# Altium PCB MP3_RS485.PcbDoc
Units mm, origin at the board's own origin, x right, y up, seen from the top; angles counter-clockwise.
Board outline 86.77 x 66 mm, 2 copper layers (Top Layer, Bottom Layer), stack 1.569 mm thick; 124 components, 97 nets, 351 pads, 77 vias.
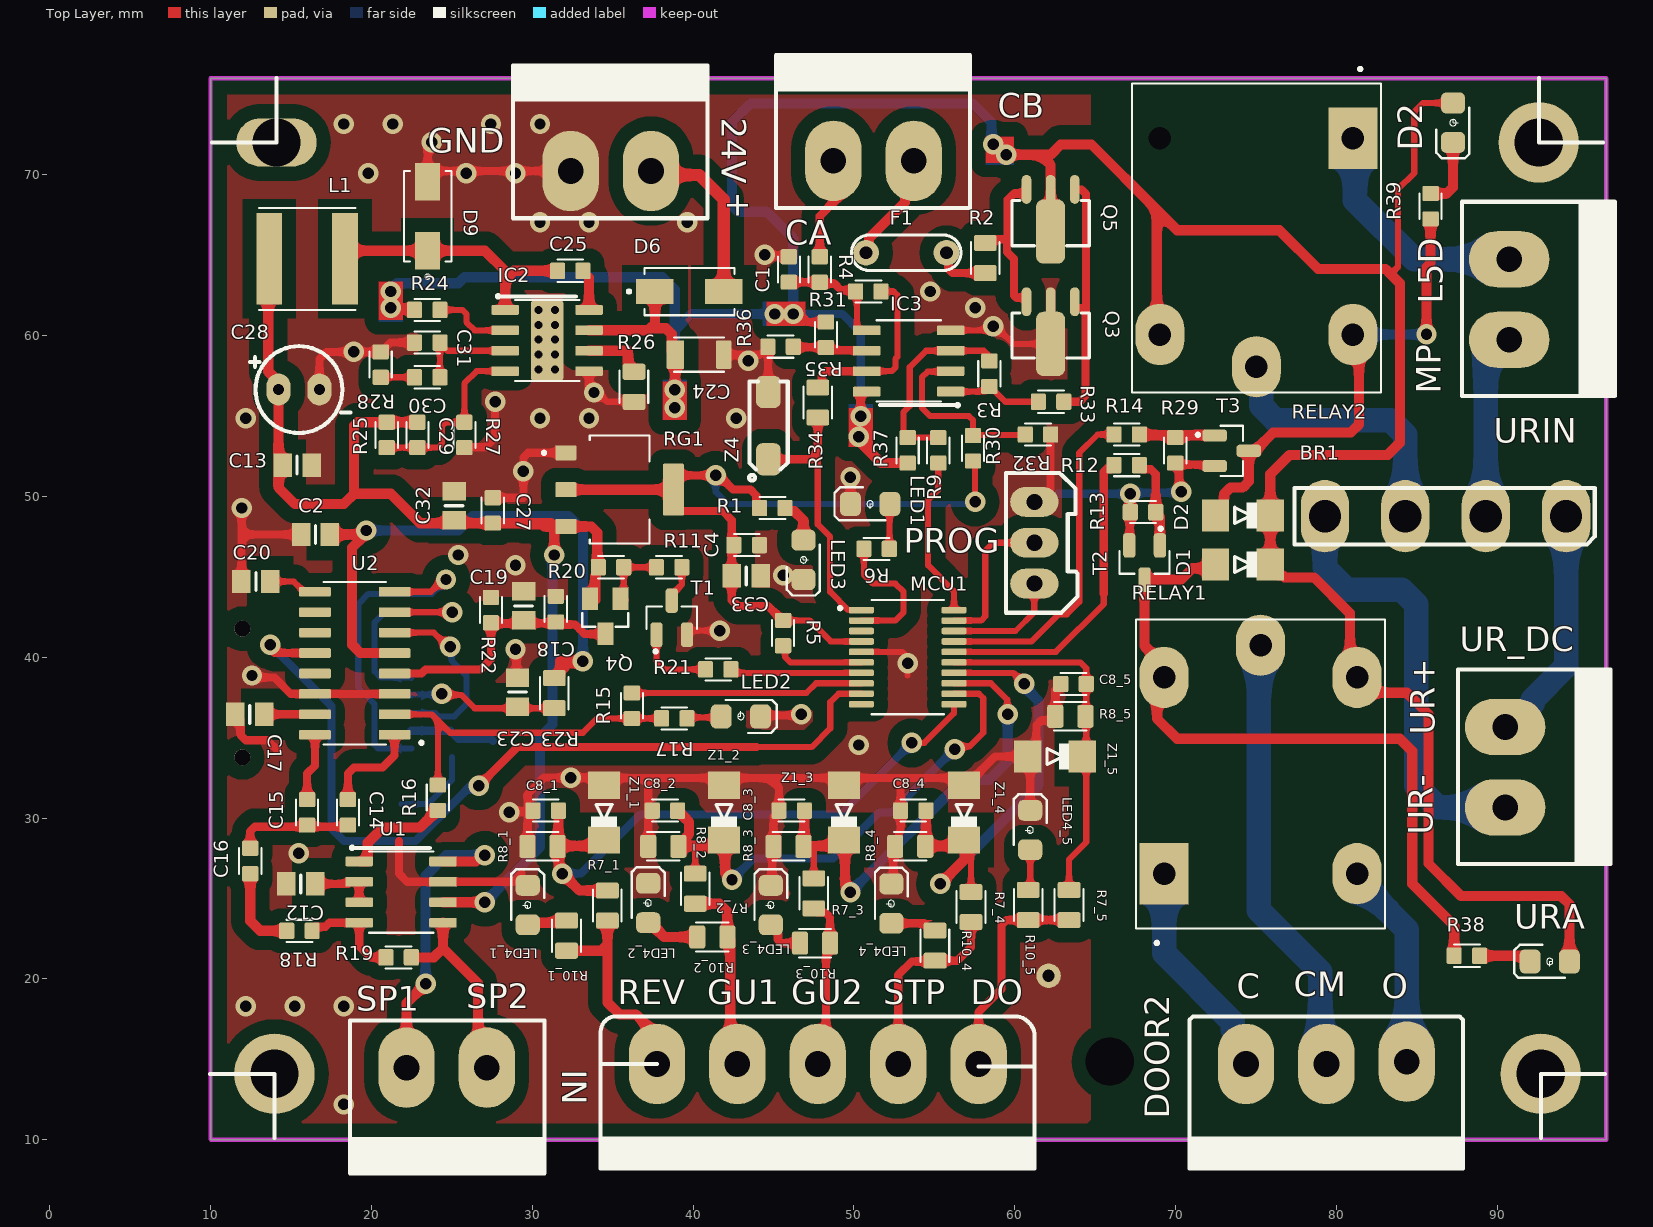
[diagram p0: Top Layer view]
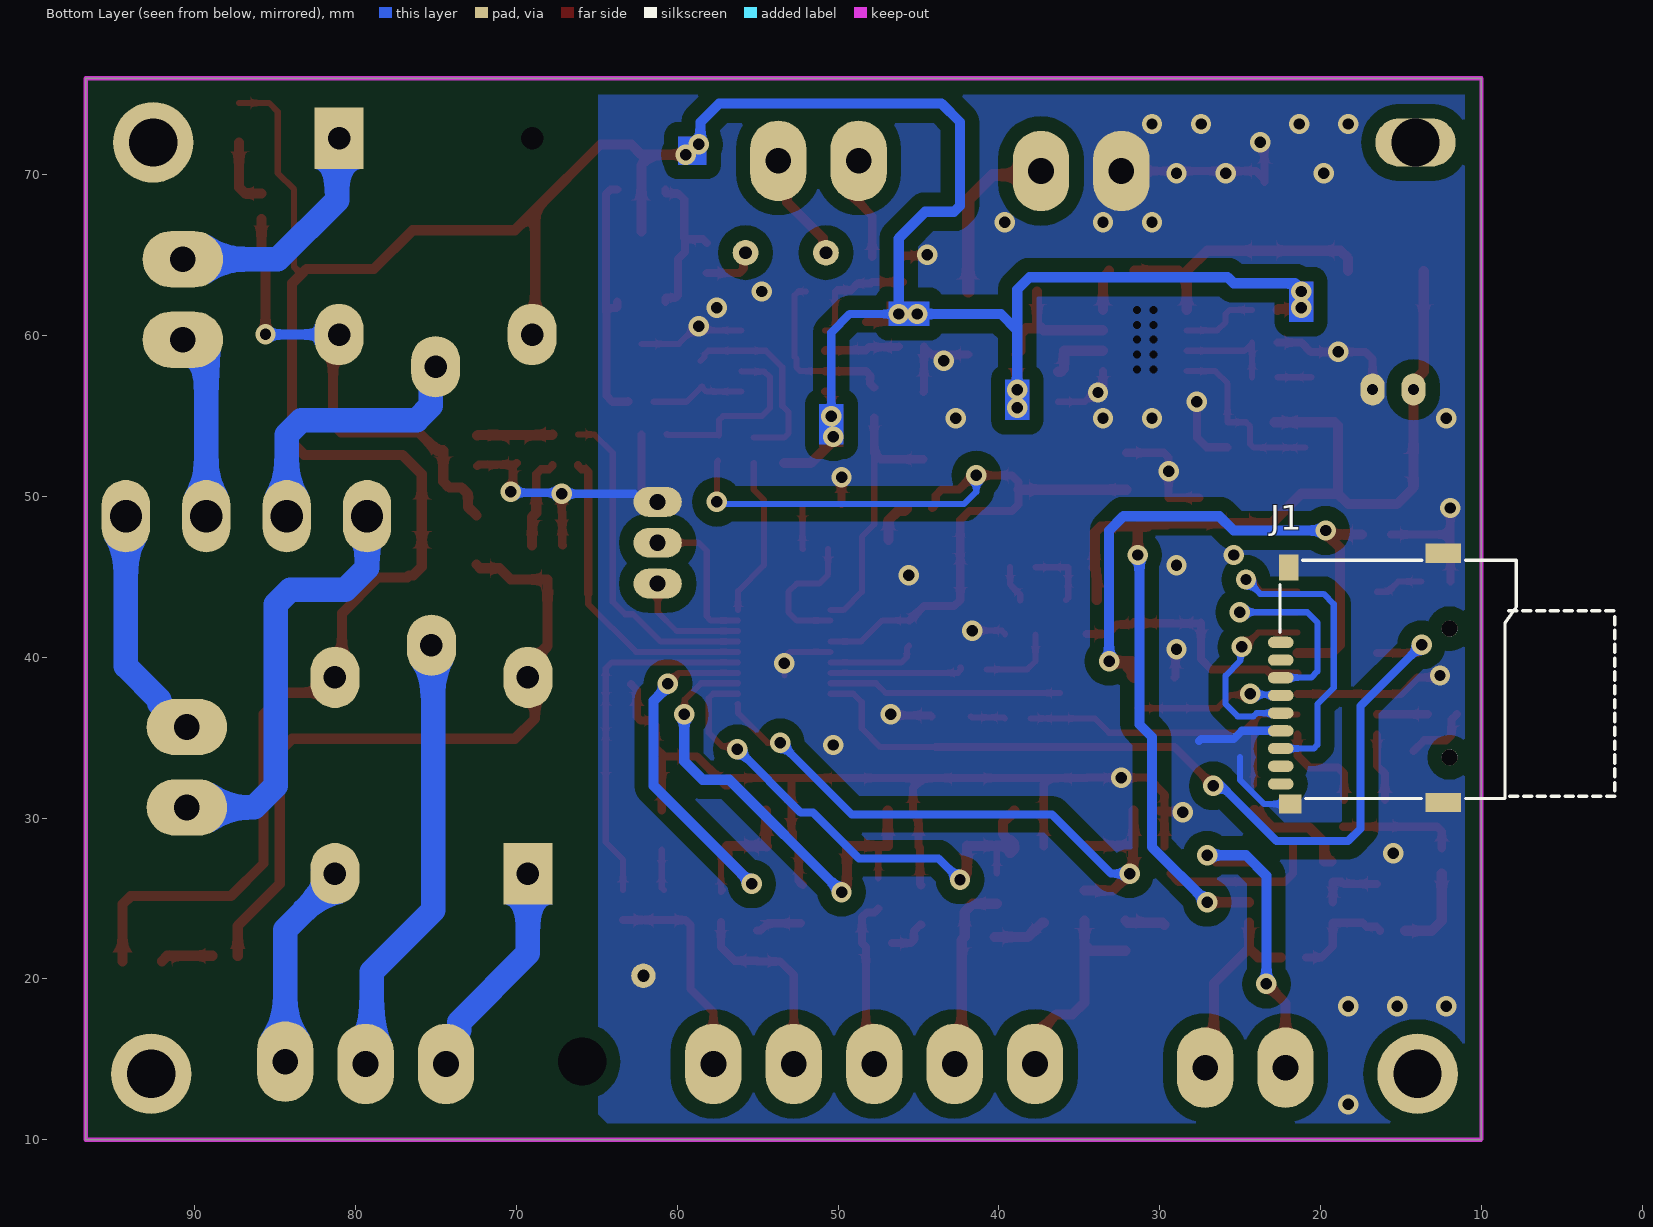
[diagram p1: Bottom Layer view, seen from below]
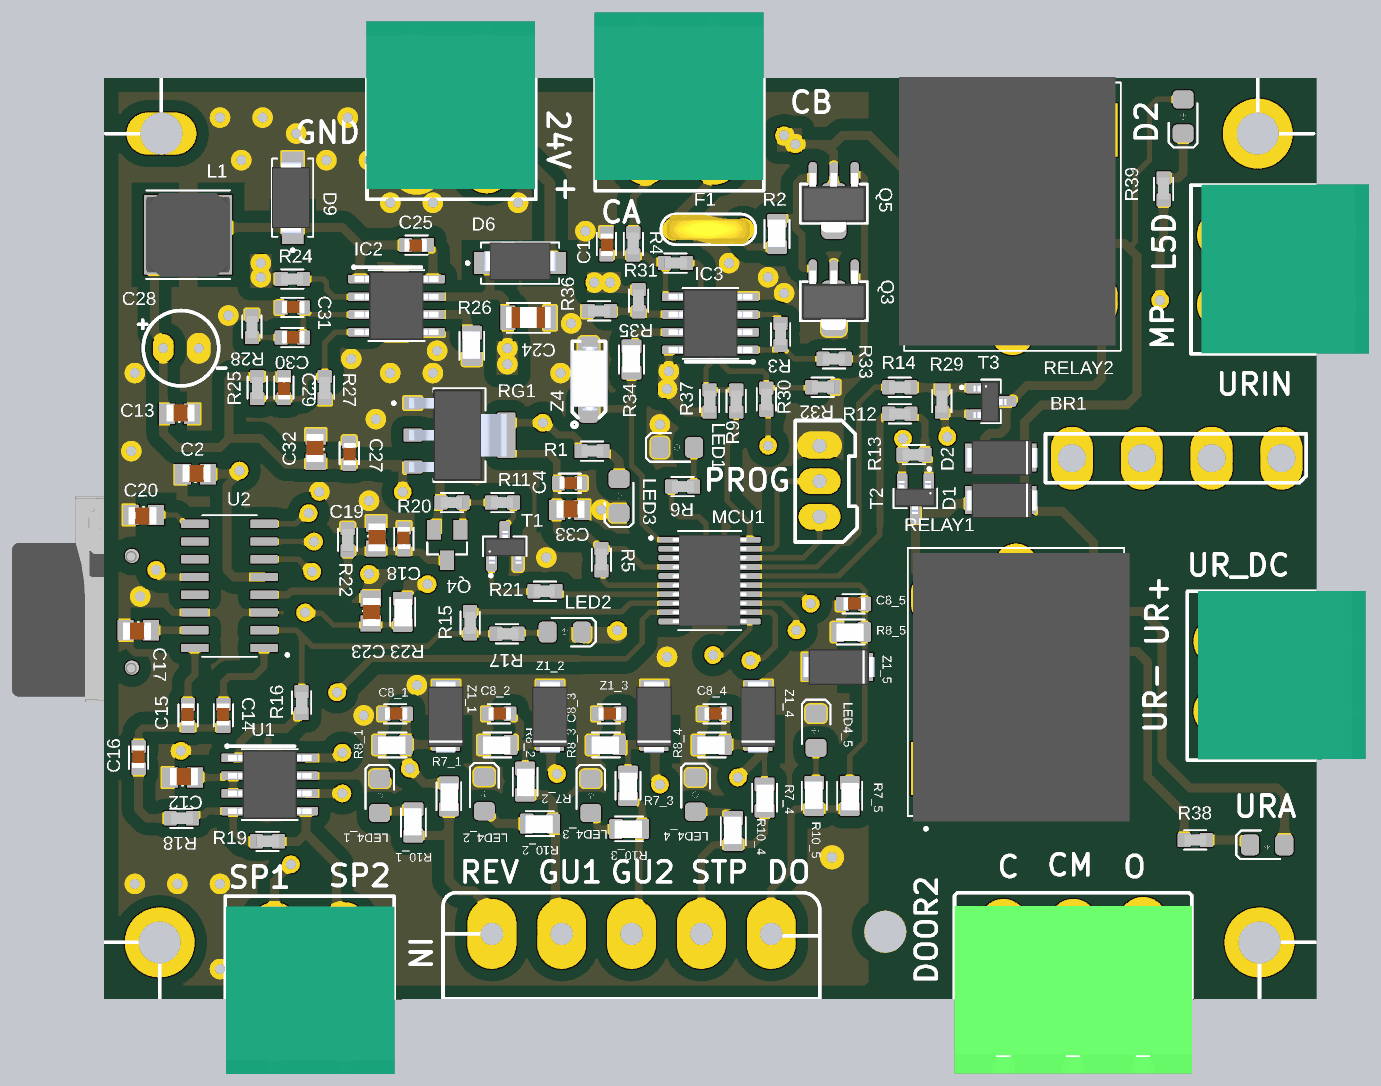
[diagram p2: 3D render of the assembled board from above, using the file's embedded part models]

## Layer stack, top to bottom
Top Solder: solder mask 0.0254, SM-001, Dk 4
Top Layer: signal copper 0.035
Dielectric 1: core 1.4986, Core-043, Dk 4.3
Bottom Layer: signal copper 0.035
Bottom Solder: solder mask 0.0254, SM-001, Dk 4

## Board outline
10,10.033 10,76 96.774,76 96.774,10 10.033,10

## Design rules (kind name [scope] priority, off if disabled: settings)
Clearance poly [InPolygon] p1: gap=0.889 ignorepadtopadclearanceinfootprint=FALSE
Clearance [All] p2: gap=0.178 ignorepadtopadclearanceinfootprint=FALSE
PolygonConnect [All] p1: connectstyle=Direct reliefconductorwidth=0.254 reliefentries=4 polygonreliefangle="90 Angle" airgapwidth=0.254
RoutingVias [All] p1: holewidth=0.711 width=1.27 viastyle="Through Hole" minholewidth=0.711 minwidth=1.27 maxholewidth=0.711 maxwidth=1.27
SolderMaskExpansion [All] p1: expansion=0.102 istentingtop=FALSE
Width [All] p1: maxlimit=2 minlimit=0.254 preferedwidth=0.254 minimp=50.000000 maximp=50.000000 favimp=50.000000
30 further rules are at their usual default settings.

## Classes and differential pairs
net class IN_24_[1..5]: IN_24_1 IN_24_2 IN_24_3 IN_24_4 IN_24_5
component class 5: C8_5 LED4_5 R7_5 R8_5 R10_5 Z1_5
component class U_RELAY: BR1 D1 D2 DOOR2 R12 R13 R14 R29 R38 R39 RELAY1 RELAY2 T2 T3 UR_DC URA URIN
channel class RES_IN24: 1 2 3 4
net class IN[1..5]: IN1 IN2 IN3 IN4 IN5
component class U_SER_24V: C1 F1 IC3 Q3 Q5 R2 R3 R4 R9 R30 R31 R32 R33 R34 R35 R36 R37 Z4
component class U_Power_Low_V: C24 C25 C27 C28 C29 C30 C31 C32 C33 D9 IC2 L1 LED3 R1 R24 R25 R26 R27 R28 RG1
component class U_MP3: C2 C12 C13 C14 C15 C16 C17 C18 C19 C20 C23 J1 LED2 Q4 R11 R15 R16 R17 R18 R19 R20 R21 R22 R23 SP1 T1 U1 U2
component class U_MCU: C4 LED1 MCU1 PROG R5 R6
component class Multi: 24V CA D6 IN
component class 4: C8_4 LED4_4 R7_4 R8_4 R10_4 Z1_4
component class 3: C8_3 LED4_3 R7_3 R8_3 R10_3 Z1_3
component class 2: C8_2 LED4_2 R7_2 R8_2 R10_2 Z1_2
component class 1: C8_1 LED4_1 R7_1 R8_1 R10_1 Z1_1

## Components (designator, comment, footprint, x,y, rotation, side; value= is the part's Value field where it differs from the comment)
24V "" CONECTOR/FONIX/2PIN 37.312,70.294 r180 top
BR1 "GBU410" BRIDGE_GBU410 94.281,48.768 r180 top
C1 "1NF" CAP-0603 45.974,64.008 r270 top
C2 "1uF" CAP-0805 17.446,47.603 r180 top
C4 "100nF" CAP-0603 43.434,46.99 r0 top
C8_1 "10nF" CAP-0603 30.936,30.48 r0 top (schematic designator C8)
C8_2 "10nF" CAP-0603 38.354,30.48 r0 top (schematic designator C8)
C8_3 "10nF" CAP-0603 46.228,30.48 r0 top (schematic designator C8)
C8_4 "10nF" CAP-0603 53.796,30.48 r0 top (schematic designator C8)
C8_5 "10nF" CAP-0603 63.754,38.354 r0 top (schematic designator C8)
C12 "1uF" CAP-0805 16.535,25.886 r180 top
C13 "1uF" CAP-0805 16.303,51.921 r180 top
C14 "1uF" CAP-0603 18.52,30.455 r90 top
C15 "1uF" CAP-0603 15.98,30.455 r90 top
C16 "100nF" CAP-0603 12.446,27.432 r90 top
C17 "1uF" CAP-0805 11.51,36.471 r0 top
C18 "100nF" CAP-0603 31.442,43.094 r90 top
C19 "1uF" CAP-0805 29.442,42.266 r90 top
C20 "1uF" CAP-0805 11.891,44.726 r0 top
C23 "1uF" CAP-0805 29.061,36.91 r90 top
C24 "10UF" CAP-1206 40.386,58.674 r0 top
C25 "100nF" CAP-0603 32.258,64.008 r180 top
C27 "100nF" CAP-0603 27.559,49.022 r270 top
C28 "100uF/16V" CAP-EL-P100mil 15.494,56.64 r180 top
C29 "NU" CAP-0603 22.877,53.717 r270 top
C30 "100pF" CAP-0603 23.57,57.421 r0 top
C31 "NU" CAP-0603 23.57,59.58 r0 top
C32 "1uF" CAP-0805 25.168,50.339 r270 top
C33 "10uF" CAP-0805 44.225,45.04 r180 top
CA "" CONECTOR/FONIX/2PIN 53.648,70.929 r180 top (schematic designator RS)
D1 "4148" mini_melf 74.041,45.72 r180 top
D2 "LED?" LED/0805 87.249,72.009 r90 top
D2 "4148" mini_melf 74.041,48.768 r180 top
D6 "M7" DIOD/1N4007/SMD 37.611,62.738 r0 top
D9 "US1M" DIOD/1N4007/SMD 23.495,65.259 r90 top
DOOR2 "CONECTOR/FONIX/3PIN" CONECTOR/FONIX/3PIN 74.375,14.708 r0 top
F1 "fuze" PPTC 53.433,64.851 r180 top
IC2 "MP4560DN" SOP8_HIT 28.352,61.557 r0 top
IC3 "LM358" SOP-8 53.021,58.547 r180 top
IN "phonix_5pin" phonix_5pin 37.752,14.708 r0 top (schematic designator *)
J1 "SD_MICRO" MEMORY_RAVIS 14.478,37.973 r270 bottom
L1 "680uH" NR6028T680 16.002,64.77 r180 top
LED1 "LED-1COLER" LED/0805 49.784,49.53 r0 top
LED2 "R" LED/0805 44.196,36.322 r180 top
LED3 "G" LED/0805 46.863,44.831 r90 top
LED4_1 "R" LED/0805 29.718,25.818 r270 top (schematic designator LED4)
LED4_2 "R" LED/0805 37.211,25.945 r270 top (schematic designator LED4)
LED4_3 "R" LED/0805 44.831,25.818 r270 top (schematic designator LED4)
LED4_4 "R" LED/0805 52.324,25.908 r270 top (schematic designator LED4)
LED4_5 "R" LED/0805 60.96,30.48 r270 top (schematic designator LED4)
MCU1 "STM32G030F6P6" stm32G030F6P6 53.34,40.005 r0 top
PROG "XH3" XH3 61.238,49.633 r270 top
Q3 "PNP" SOT-89 62.23,62.103 r90 top
Q4 "AO3401" AO3401A 34.417,42.672 r180 top
Q5 "NPN" SOT-89 62.23,69.088 r90 top
R1 "1K" RES/0603 44.831,49.276 r180 top
R2 "4.7r" RES/0805 57.233,65.864 r270 top
R3 "100K" RES/0603 58.42,57.531 r270 top
R4 "1K" RES/0603 47.879,64.008 r270 top
R5 "1K" RES/0603 45.593,41.402 r270 top
R6 "1K" RES/0603 51.308,46.736 r180 top
R7_1 "6.8K" RES/0805 35.604,23.509 r90 top (schematic designator R7)
R7_2 "6.8K" RES/0805 41.065,24.56 r90 top (schematic designator R7)
R7_3 "6.8K" RES/0805 48.431,24.271 r90 top (schematic designator R7)
R7_4 "6.8K" RES/0805 58.21,23.417 r90 top (schematic designator R7)
R7_5 "6.8K" RES/0805 64.306,23.544 r90 top (schematic designator R7)
R8_1 "39K" RES/0805 29.591,27.305 r0 top (schematic designator R8)
R8_2 "39K" RES/0805 37.098,27.305 r0 top (schematic designator R8)
R8_3 "39K" RES/0805 44.88,27.305 r0 top (schematic designator R8)
R8_4 "39K" RES/0805 52.451,27.305 r0 top (schematic designator R8)
R8_5 "39K" RES/0805 62.406,35.389 r0 top (schematic designator R8)
R9 "1K" RES/0603 55.245,52.959 r90 top
R10_1 "6.8K" RES/0805 31.198,23.735 r270 top (schematic designator R10)
R10_2 "6.8K" RES/0805 40.146,21.673 r0 top (schematic designator R10)
R10_3 "6.8K" RES/0805 46.531,21.292 r0 top (schematic designator R10)
R10_4 "6.8K" RES/0805 54.102,23.114 r270 top (schematic designator R10)
R10_5 "6.8K" RES/0805 59.9,25.64 r270 top (schematic designator R10)
R11 "100R" RES/0603 38.608,45.593 r0 top
R12 "100r" RES/0603 67.056,51.943 r0 top
R13 "10k" RES/0603 68.072,49.022 r0 top
R14 "100r" RES/0603 67.056,53.848 r0 top
R15 "2.2K" RES/0603 36.195,37.084 r90 top
R16 "2.2K" RES/0603 24.13,31.369 r90 top
R17 "2.2K" RES/0603 38.735,36.195 r180 top
R18 "2.2K" RES/0603 15.423,22.987 r180 top
R19 "10K" RES/0603 21.59,21.336 r180 top
R20 "10K" RES/0603 34.996,45.593 r0 top
R21 "1K" RES/0603 41.656,39.243 r0 top
R22 "2.2K" RES/0603 27.432,43.031 r90 top
R23 "4.7R" RES/0805 32.302,36.717 r90 top
R24 "47K" RES/0603 23.566,61.595 r0 top
R25 "220K" RES/0603 20.955,53.919 r90 top
R26 "680K" RES/0805 35.389,57.863 r270 top
R27 "42.2K" RES/0603 25.781,53.919 r90 top
R28 "47K" RES/0603 20.574,58.293 r90 top
R29 "10k" RES/0603 69.977,52.959 r90 top
R30 "1K" RES/0603 57.404,53.086 r90 top
R31 "100K" RES/0603 50.8,62.738 r180 top
R32 "1K" RES/0603 61.341,53.848 r180 top
R33 "1K" RES/0603 62.357,55.88 r0 top
R34 "6.8K" RES/0805 46.819,56.882 r270 top
R35 "10K" RES/0603 48.26,59.944 r270 top
R36 "10K" RES/0603 45.537,59.309 r0 top
R37 "1K" RES/0603 53.34,52.959 r90 top
R38 "10K" RES/0603 88.011,21.436 r180 top
R39 "10K" RES/0603 85.852,67.945 r270 top
RELAY1 "RELAY-24V" RELAY-5V#1 81.249,26.52 r90 top
RELAY2 "RELAY-24V" RELAY-5V#2 69.057,72.286 r270 top
RG1 "AMS1117" AMS1117 35.179,50.419 r0 top
SP1 "CONECTOR/FONIX/2PIN" CONECTOR/FONIX/2PIN 22.251,14.415 r0 top (schematic designator SP)
T1 "7002" SOT23 37.724,41.396 r270 top
T2 "2N7002" SOT23 69.022,46.957 r90 top
T3 "2N7002" SOT23 72.423,53.782 r180 top
U1 "AD8002D" SOP-8 22.225,25.273 r0 top
U2 "MY1690X-16S" TL494_SMD 18.796,40.005 r180 top
UR_DC "" CONECTOR/FONIX/2PIN 90.551,30.734 r90 top
URA "LED?" LED/0805 92.038,21.082 r0 top
URIN "" CONECTOR/FONIX/2PIN 90.805,59.817 r90 top
Z1_1 "3.3V" mini_melf 34.417,30.48 r90 top (schematic designator Z1)
Z1_2 "3.3V" mini_melf 41.875,30.48 r90 top (schematic designator Z1)
Z1_3 "3.3V" mini_melf 49.333,30.48 r90 top (schematic designator Z1)
Z1_4 "3.3V" mini_melf 56.79,30.48 r90 top (schematic designator Z1)
Z1_5 "3.3V" mini_melf 62.357,33.782 r180 top (schematic designator Z1)
Z4 "3.3V" DIOD/RS1J 44.577,54.483 r90 top

## Footprints (in the part's own frame and the unit in brackets; to place one, negate y for a bottom-side part, rotate by r counter-clockwise, add the part's x,y. Pads: shape width x height; smd on the part's side, far side on the other; paste and mask are expansions set on the pad)
AMS1117 [mm]
  rrect15% 1.31x0.93 smd: 1(-3.091,2.29) 2(-3.091,0) 3(-3.091,-2.29)
  rrect15% 1.31x3.24 smd: 4(3.599,0)
  silkscreen extent -4.55,-3.36 2.11,3.36, body extent -3.37,-3.25 3.63,3.25, height 1.73
AO3401A [mm]
  rect 1x1.4 smd: D(-0.127,1.227) G(-1.077,-0.973) S(0.823,-0.973)
  silkscreen extent -1.55,-0.06 1.3,0.79
BRIDGE_GBU410 [mm]
  oval 3x4.5 hole 2: +(0,0) -(15,0) F(5,0) N(10,0)
  silkscreen extent -1.78,-1.75 16.89,1.75
CAP-0603 [mm]
  rrect20% 0.94x1.02 smd: 1(-0.893,-0.017) 2(0.687,-0.017)
  silkscreen extent -0.9,-0.71 0.7,0.67, body extent -0.84,-0.44 0.76,0.46, height 0.77
CAP-0805 [mm]
  rect 1.15x1.45 smd: 1(0.025,-0.022) 2(1.825,-0.022)
  silkscreen extent 0.93,-0.57 0.93,0.53, body extent -0.17,-0.71 1.84,0.54, height 0.94
CAP-1206 [mm]
  rrect14% 1.09x1.77 smd: 1(-1.488,0.139)
  rrect14% 0.94x1.77 smd: 2(1.517,0.139)
  silkscreen extent -1.57,-0.93 1.53,1.2, body extent -1.63,-0.6 1.57,0.9, height 1.6
CAP-EL-P100mil [mm]
  oval 1.5x2 hole 0.7: +(1.27,-0.002) -(-1.27,-0.002)
  silkscreen extent -3.2,-2.7 3.04,2.7
CONECTOR/FONIX/2PIN [mm]
  oval 3.5x5 hole 1.6: 1(-0.073,0.063) 2(4.927,0.063)
  silkscreen extent -3.58,-6.5 8.5,3, body extent -3.54,-9.75 8.54,2.25, height 3
CONECTOR/FONIX/3PIN [mm]
  oval 3.5x5 hole 1.6: 1(0,0) 2(5,0) 3(10,0.144)
  silkscreen extent -3.5,-6.5 13.5,2.96, body extent -3.5,-10 13.5,2, height 8.8
DIOD/1N4007/SMD [mm]
  rect 2.33x1.56 smd: A(4.299,0) K(0.019,0)
  silkscreen extent -1.7,-1.48 4.96,1.48, body extent -0.44,-1.24 4.76,1.49, height 2.6
DIOD/RS1J [mm]
  rrect50% 2x1.524 smd: A(2.013,-0.106) K(-2.178,-0.106)
  silkscreen extent -3.5,-1.31 2.65,1.09, body extent -2.32,-1.44 2.28,1.16, height 2.1
LED/0805 [mm]
  rrect50% 1.3x1.5 smd: A(2.45,0) K(0,0)
  silkscreen extent -0.99,-1.02 2.16,1.03
MEMORY_RAVIS [mm]
  oval 0.7x1.6 smd: 1(-2.95,-8) 2(-1.85,-8) 3(-0.75,-8) 4(0.35,-8) 5(1.45,-8) 6(2.55,-8) 7(3.65,-8) 8(4.75,-8) 9(5.85,-8)
  rect 1.2x1.4 smd: SH1(7.1,-7.4)
  rect 1.2x2.2 smd: SH2(7,2.1) SH3(-8.5,2.1)
  rect 1.6x1.2 smd: SH4(-7.6,-7.5)
  round 1 hole 1 unplated: ""(-3.8,2.5) ""(4.2,2.5)
  silkscreen extent -8.05,-8.05 6.75,12.77, body extent -8.75,-8.45 7.35,11.07, height 1.85
mini_melf [mm]
  rect 1.7x2 smd: A(1.557,-0.049) K(-1.843,-0.049)
  silkscreen extent -1.01,-0.84 0.36,0.74, body extent -2.79,-1.31 2.35,1.25, height 2.5
NR6028T680 [mm]
  rect 1.6x5.7 smd: 1(-2.35,0) 2(2.35,0)
  silkscreen extent -3,-3.17 3,3.17, body extent -3,-3 3,3, height 2.8
phonix_5pin [mm]
  oval 3.5x5 hole 1.6: 1(0,0) 2(5,0) 3(10,0) 4(15,0) 5(20,0)
  silkscreen extent -3.5,-6.5 23.5,2.96
PPTC [mm]
  round 1.6 hole 0.8 mask+0.075: 1(-2.32,-0.3) 2(2.68,-0.3)
  silkscreen extent -3.22,-1.4 3.58,0.8, body extent -2.82,-1.35 3.18,0.75, height 8.1
RELAY-5V#1 [mil]
  rect 150x120 hole 55.12: 1(0.91,471.22)
  oval 150x120 hole 55.12: 2(0.91,-1.22) 3(481.22,471.22) 4(559.96,235) 5(481.22,-1.22)
  silkscreen extent -173,-70 623,540, body extent -148,-85 608,525, height 604
RELAY-5V#2 [mil]
  rect 150x120 hole 55.12: 1(0.91,471.22)
  round 0 hole 55.12: 2(0.91,-1.22)
  oval 150x120 hole 55.12: 3(481.22,471.22) 4(559.96,235) 5(481.22,-1.22)
  silkscreen extent -173,-70 623,540, body extent -148,-85 608,525, height 604
RES/0603 [mm]
  rrect20% 0.94x1.02 smd: 1(-0.889,0) 2(0.691,0)
  silkscreen extent -0.9,-0.69 0.7,0.69, body extent -0.93,-0.41 0.67,0.39, height 0.43
RES/0805 [mm]
  rrect25% 1x1.42 smd: 1(0.113,0.933) 2(1.983,0.933)
  silkscreen extent 0.05,0.04 2.05,1.82, body extent 0,0.28 2,1.53, height 0.6
SOP8_HIT [mm]
  rrect25% 1.71x0.61 smd: 1(-0.034,0.038) 2(-0.034,-1.232) 3(-0.034,-2.502) 4(-0.034,-3.772) 5(5.176,-3.772) 6(5.176,-2.502) 7(5.176,-1.232) 8(5.176,0.038)
  round 0 hole 0.5: 5(2.032,-3.67) 5(2.032,-2.743) 5(2.032,-1.816) 5(2.032,-0.889) 5(2.032,0.038) 5(3.048,-3.67) 5(3.048,-2.743) 5(3.048,-1.816) 5(3.048,-0.889) 5(3.048,0.038)
  rrect25% 2.032x5.08 smd: 5(2.571,-1.867)
  silkscreen extent -0.58,-4.4 4.57,0.98, body extent -0.43,-4.32 5.57,0.58, height 1.75
SOP-8 [mm]
  rrect25% 1.71x0.61 smd: 1(-2.986,2.032) 2(-2.986,0.762) 3(-2.986,-0.508) 4(-2.986,-1.778) 5(2.224,-1.778) 6(2.224,-0.508) 7(2.224,0.762) 8(2.224,2.032)
  silkscreen extent -3.53,-2.4 1.62,2.98, body extent -3.38,-2.32 2.62,2.58, height 1.75
SOT23 [mil]
  rrect50% 60x30 smd: 1(-0.24,0) 2(-83.7,37.4) 3(-0.24,74.8)
  silkscreen extent -70,-24 45,99, body extent -86,-19 7,96, height 44
SOT-89 [mm]
  oval 1.8x0.6 smd: 1(0,-1.5) 2(0,0) 3(0,1.5)
  rrect50% 4x1.8 smd: 2(-2.621,0)
  silkscreen extent -3.5,-2.4 -0.7,2.4, body extent -4.15,-2.3 0.1,2.3, height 1.59
stm32G030F6P6 [mm]
  rrect50% 1.56x0.41 smd: 1(-2.88,2.925) 2(-2.88,2.275) 3(-2.88,1.625) 4(-2.88,0.975) 5(-2.88,0.325) 6(-2.88,-0.325) 7(-2.88,-0.975) 8(-2.88,-1.625) 9(-2.88,-2.275) 10(-2.88,-2.925) 11(2.88,-2.925) 12(2.88,-2.275) 13(2.88,-1.625) 14(2.88,-0.975) 15(2.88,-0.325) 16(2.88,0.325) 17(2.88,0.975) 18(2.88,1.625) 19(2.88,2.275) 20(2.88,2.925)
  silkscreen extent -4.3,-3.55 2.25,3.55, body extent -3.2,-3.25 3.2,3.25, height 0.53
TL494_SMD [mm]
  rrect25% 1.97x0.6 smd: 1(-2.644,4.826) 2(-2.644,3.556) 3(-2.644,2.286) 4(-2.644,1.016) 5(-2.644,-0.254) 6(-2.644,-1.524) 7(-2.644,-2.794) 8(-2.644,-4.064) 9(2.306,-4.064) 10(2.306,-2.794) 11(2.306,-1.524) 12(2.306,-0.254) 13(2.306,1.016) 14(2.306,2.286) 15(2.306,3.556) 16(2.306,4.826)
  silkscreen extent -4.41,-4.68 1.78,5.45
XH3 [mm]
  oval 1.85x3 hole 1: 1(-0.024,-0.024) 2(2.516,-0.024) 3(5.056,-0.024)
  silkscreen extent -1.83,-1.78 6.87,2.67

## Part data
24V CA UR_DC URIN: library part CONECTOR/FONIX/2PIN
BR1: library part "BRIDGE RECTIFIERS"
C1 C2 C4 C8_1 C8_2 C8_3 C8_4 C8_5 C12 C13 C14 C15 C16 C17 C18 C19 C20 C23 C24 C25 C27 C29 C30 C31 C32 C33: library part cap_smd
C28: library part cap-electrolit
D1 D2 D6 D9: library part DIOD/RECTIFIERS
D2 LED2 LED3 LED4_1 LED4_2 LED4_3 LED4_4 LED4_5 URA: library part LED-1COLER
J1: library part SOCKET_SDMICRO_AT, "SD MICRO exist in Iran, Attend 112J-TDAR-R01", MANF=Attend, MANF_P#=112J-TDAR-R01, PARAM=push-push
L1: library part inductor
Q4: library part MOSFET_P_CH
R1 R2 R3 R4 R5 R6 R7_1 R7_2 R7_3 R7_4 R7_5 R8_1 R8_2 R8_3 R8_4 R8_5 R9 R10_1 R10_2 R10_3 R10_4 R10_5 R11 R12 R13 R14 R15 R16 R17 R18 R19 R20 R21 R22 R23 R24 R25 R26 R27 R28 R29 R30 R31 R32 R33 R34 R35 R36 R37 R38 R39: library part RES/SMD
RELAY1 RELAY2: library part RELAY-5V
T1 T2 T3: library part NPN
U2: "IC, MP3 Player"
Z1_1 Z1_2 Z1_3 Z1_4 Z1_5 Z4: library part zener-0.5w

## Free pads (board coordinates)
  round 5 hole 3: 5(13.97,14.097) 5(92.583,72.009) 5(92.71,14.097)
  oval 5x3 hole 3: 5(14.097,72.009)
  round 1.524 hole 3: 5(65.913,14.859)
  round 1.524 hole 0.762: 6(62.103,20.193)

## Via types
v1: diameter 1.27, hole 0.711, Top Layer to Bottom Layer, 77 vias

## Nets (pads, with @x,y where several pads share a name; then routed paths per layer and width w, separated by ;. In a path a pad name is that pad's centre, name@x,y a point inside that pad or via, vN(x,y) a via of type N, cw(c..) or ccw(c..) an arc to the next point about the centre after c; other vN are vias at no path point)
+3.3: C4.1 C33.2 MCU1.4 R1.2 R5.1 R30.1 RG1.2 RG1.4 | length 52.9
  Top Layer w0.381: R5.1 47.244,42.291 48.555,40.98 MCU1.4 ; R30.1@57.466,52.219 57.531,52.155 v1(57.531,49.657)
  Top Layer w0.508: R1.2 43.924,49.492 43.924,50.056 43.561,50.419 42.489,50.419 41.6,51.308 v1(41.402,51.308) 39.179,51.308 38.778,50.907 RG1.4 38.778,49.488 39.179,49.087 41.845,49.087 42.4,48.532 C33.2 42.4,43.559 42.779,43.18 44.664,43.18 45.553,42.291 R5.1
  Top Layer w0.635: RG1.2 RG1.4
  Bottom Layer w0.381: v1(41.402,51.308) 41.402,50.292 42.164,49.53 v1@57.404,49.53
+3.3_MP3: C2.1 R23.2 U2.5 | length 40
  Top Layer w0.635: C2.1 19.259,47.625 19.513,47.879 v1(19.685,47.879) 19.685,47.707 18.796,46.818 18.796,40.767 19.304,40.259 U2.5 ; R23.2 R23.2@31.558,38.7 ; R23.2@31.558,38.7 31.579,38.7 31.762,38.883 31.762,39.092 32.004,39.335 32.004,39.506 32.127,39.629 33.025,39.629 v1(33.147,39.751) 31.741,39.751 31.741,38.883 R23.2@31.558,38.7
  Bottom Layer w0.635: v1(19.685,47.879) 25.4,47.879 26.289,48.768 32.258,48.768 33.147,47.879 v1(33.147,39.751)
+5: C13.2 C27.2 C28.+ C29.1 C32.2 L1.2 Q4.S R20.1 R25.2 RG1.3 U1.6 | length 77.4
  Top Layer w0.635: L1.2@13.589,64.008 13.589,57.761 14.224,57.126 C28.+ 14.224,50.546 15.24,49.53 18.288,49.53 18.923,50.165 ; C29.1 R25.2 19.146,54.61 18.923,54.387 18.923,50.165 ; U1.6@24.462,24.753 U1.6 v1(27.051,24.765) ; 29.562,48.26 30.607,48.26 30.738,48.129 RG1.3 33.67,48.129 34.042,47.757 34.042,45.658 R20.1 33.954,45.44 33.954,45.069 33.914,45.029 Q4.S@33.914,43.561 ; v1(31.369,46.355) 31.369,48.133 31.167,48.335 C27.2 23.039,48.335 21.209,50.165 18.923,50.165
  Bottom Layer w0.635: v1(27.051,24.765) 30.48,28.194 30.48,35.039 31.255,35.814 31.255,46.241 v1(31.369,46.355)
+5_MP3: C18.1 C19.1 Q4.D R22.1 U2.4 | length 16.6
  Top Layer w0.508: U2.4 23.114,38.989 23.368,39.243 26.797,39.243 27.432,39.878 R22.1 27.484,42.089 C19.1@29.591,42.089 ; C19.1@29.21,42.112 31.548,42.112 C18.1@31.369,42.291 ; C18.1@31.609,42.173 31.751,42.032 32.662,42.032 32.955,41.739 33.249,41.445 Q4.D
+24: C24.1 D1.K D2.A@87.249,74.459 D2.K@75.884,48.817 D6.K IC2.7 IC3.8 Q5.2 R24.1 R35.1 R37.1 RELAY1.5 RELAY2.5 URA.A | length 217
  Top Layer w0.381: 83.376,63.817 83.82,64.262 83.82,69.088 84.836,70.104 84.836,73.914 85.381,74.459 D2.A@87.249,74.459
  Top Layer w0.508: v1(46.228,61.341) 46.609,61.341 47.117,60.833 R35.1 ; v1(50.419,54.991) 50.419,56.464 50.47,56.515 IC3.8
  Top Layer w0.635: v1(21.209,61.722) 21.273,61.658 22.613,61.658 R24.1 ; IC2.7 37.211,60.325 37.338,60.452 ; D6.K 37.63,60.744 37.338,60.452 ; v1(38.862,56.642) 38.88,56.66 38.88,58.795 C24.1 38.671,59.041 38.671,60.08 38.299,60.452 37.338,60.452 ; v1(50.419,54.991) 50.419,53.34 51.689,52.07 R37.1 ; v1(58.674,71.882) 58.846,71.882 v1(59.481,71.247) 61.595,71.247 ; Q5.2@62.23,66.467 62.23,69.088 62.23,70.612 61.595,71.247 ; RELAY2.5 68.834,60.255 68.834,67.818 ; URA.A 94.488,24.638 93.98,25.146 87.757,25.146 85.725,27.178 85.725,36.449 84.381,37.793 82.207,37.793 81.107,38.893 80.835,38.893 80.835,42.736 78.613,44.958 76.788,44.958 76.66,45.086 76.416,45.086 75.884,45.619 75.884,48.817 75.884,51.373 77.089,52.578 83.185,52.578 83.947,53.34 83.947,63.246 83.376,63.817 83.058,64.135 78.867,64.135 76.454,66.548 70.104,66.548 68.834,67.818 ; 61.595,71.247 62.23,71.247 62.865,71.882 64.77,71.882 68.834,67.818
  Bottom Layer w0.508: v1(46.228,61.341) 49.276,61.341 50.419,60.198 v1(50.419,54.991)
  Bottom Layer w0.635: v1(21.209,61.722) 21.209,62.874 21.581,63.246 25.4,63.246 25.781,63.627 38.1,63.627 38.862,62.865 38.862,60.334 ; v1(38.862,56.642) 38.862,60.334 ; v1@58.547,71.882 58.547,73.279 57.404,74.422 43.561,74.422 42.418,73.279 42.418,68.063 42.79,67.691 44.577,67.691 46.228,66.04 v1(46.228,61.341) 39.869,61.341 38.862,60.334
  other v1: 50.292,53.721 38.862,55.499 45.085,61.341 21.209,62.738
AUDIO: C14.1 C15.1 C16.2 | length 7.3
  Top Layer w0.508: C16.2 12.463,29.166 12.761,29.464 C14.1@18.593,29.464
Busy: R15.1 R16.2 R17.2 U2.2 | length 21.5
  Top Layer w0.381: U2.2 23.749,36.449 24.13,36.068 ; R16.2 24.13,36.068 ; R17.2 R15.1 34.036,36.195 33.147,35.306 24.892,35.306 24.13,36.068
BUSY_MP3: MCU1.8 R15.2 | length 14.5
  Top Layer w0.381: R15.2 47.046,37.775 47.651,38.38 MCU1.8
DACL: C15.2 U2.16 | length 4.2
  Top Layer w0.508: C15.2 16.002,31.147 16.002,32.766 16.49,33.254 U2.16
DACR: C14.2 U2.1 | length 6.3
  Top Layer w0.508: C14.2 18.537,32.761 18.923,33.147 20.701,33.147 21.44,33.886 U2.1
EN_AMP: R16.1 U1.1 | length 6.8
  Top Layer w0.635: U1.1@19.316,27.305 19.764,27.305 19.776,27.317 19.776,28.469 20.725,29.417 23.027,29.417 24.09,30.48 R16.1
GND: 24V.2 C1.1 C2.2 C4.2 C8_1.1 C8_2.1 C8_3.1 C8_4.1 C8_5.1 C12.2 C13.1 C17.1 C18.2 C19.2 C20.1 C23.2 C24.2 C27.1 C28.- C31.1 C32.1 C33.1 D9.A IC2.5 IC3.4 J1.6 J1.SH1 J1.SH2 J1.SH3 J1.SH4 LED1.K LED2.K LED3.K LED4_1.K LED4_2.K LED4_3.K LED4_4.K LED4_5.K MCU1.5 pad.6 PROG.1 Q3.2 R8_1.1 R8_2.1 R8_3.1 R8_4.1 R8_5.1 R13.1 R22.2 R26.2 R27.1 R28.2 R29.1 R32.1 R36.1 RG1.1 T1.3 T2.3 T3.3 U1.7 U2.3 U2.14 Z1_1.A Z1_2.A Z1_3.A Z1_4.A Z1_5.A Z4.A | length 191.1
  Top Layer w0.381: v1(33.838,56.459) 34.079,56.459 34.658,55.88 R26.2 ; T1.3 39.624,41.465 39.814,41.656 v1(41.656,41.656) ; MCU1.5 53.015,40.33 53.34,40.005 53.34,38.862 ; IC3.4 59.055,60.325 59.898,59.482 Q3.2@62.23,59.482
  Top Layer w0.508: C17.1 11.856,36.128 11.856,35.175 12.196,34.835 13.552,34.835 14.224,34.163 ; C20.1 11.927,44.715 11.927,47.625 ; v1(11.938,49.276) 11.927,49.265 11.927,47.625 ; v1(12.573,38.862) 12.7,38.735 13.97,38.735 14.986,37.719 U2.14 U2.3 ; v1(15.494,27.813) v1@15.494,28.067 ; C2.2 11.927,47.625 ; C28.- 16.764,58.547 17.201,58.984 v1(18.888,58.984) R28.2 20.614,58.984 21.193,59.563 C31.1 ; 21.717,28.575 21.717,26.543 22.225,26.035 U1.7 28.829,26.035 29.337,26.543 ; D9.A D9.A@23.495,69.705 ; v1(23.749,72.009) 23.749,71.803 23.495,71.549 D9.A@23.495,69.705 ; R27.1 25.809,53.058 27.093,53.058 27.686,53.651 v1(27.686,55.88) ; C27.1 29.447,49.915 v1(29.447,51.562) 29.447,52.411 29.745,52.709 RG1.1 ; v1(28.575,30.353) 28.63,30.408 C8_1.1@29.704,30.408 ; v1(28.956,40.491) 29.019,40.427 29.019,38.798 C23.2 ; R8_1.1 C8_1.1@29.704,30.408 ; C8_1.1@29.704,30.463 29.704,31.482 30.734,32.512 34.504,32.512 34.523,32.493 36.849,32.493 ; C8_1.1 29.988,30.408 C8_1.1@29.704,30.408 ; 24V.2 24.021,70.231 D9.A@23.495,69.705 ; IC2.5@33.528,57.785 33.528,56.769 v1(33.838,56.459) ; R8_2.1 37.211,32.131 36.849,32.493 ; C24.2 v1@43.434,58.813 ; v1(43.434,58.42) 43.561,58.547 43.561,58.813 44.192,58.813 44.648,59.269 R36.1 44.665,59.292 44.665,56.513 Z4.A ; LED2.K 44.259,36.386 46.672,36.386 v1(46.736,36.449) ; v1(44.45,65.024) 44.512,64.962 45.896,64.962 C1.1 ; LED4_3.K 44.912,25.899 44.912,28.158 R8_3.1 44.993,30.081 45.335,30.423 C8_3.1 45.335,31.881 44.723,32.493 ; LED1.K v1(49.784,51.181) ; LED4_4.K@52.197,25.857 LED4_4.K@52.247,25.908 ; LED4_4.K LED4_4.K@52.247,25.908 ; 52.903,32.195 C8_4.1 52.903,29.191 52.81,29.098 52.81,28.484 R8_4.1 52.444,28.118 52.444,26.105 LED4_4.K@52.247,25.908 ; Z1_4.A 56.989,32.037 58.782,33.831 Z1_5.A ; Z1_4.A@56.896,32.493 44.723,32.493 ; LED4_5.K 60.96,33.67 Z1_5.A ; PROG.1 61.426,49.657 62.23,50.461 R32.1 ; C8_5.1 62.861,38.297 62.519,37.955 R8_5.1 62.519,36.314 62.273,36.068 61.639,36.068 61.341,35.77 61.341,34.372 Z1_5.A ; T2.3 67.152,46.982 67.152,48.991 R13.1 v1(67.183,50.165) ; R29.1 69.996,52.07 R29.1@70.09,51.976 ; v1(70.358,50.292) 70.212,50.438 70.212,51.854 R29.1@70.09,51.976 ; T3.3 72.335,51.976 R29.1@70.09,51.976 ; 36.849,32.493 44.723,32.493
  Bottom Layer w0.381: J1.SH1 23.507,30.873 25.019,32.385 25.019,33.782
  Bottom Layer w0.508: J1.6 24.902,35.423 25.4,34.925 27.432,34.925 27.559,34.798 ; PROG.1 62.152,49.657 62.66,50.165 v1(67.183,50.165) 67.246,50.228 70.294,50.228 v1(70.358,50.292)
  other v1: 18.288,12.192 12.192,18.288 15.24,18.288 18.288,18.288 32.385,32.512 50.292,34.544 53.34,39.624 45.593,45.085 28.956,45.72 25.4,46.355 12.192,54.864 30.48,54.864 33.528,54.864 42.672,54.864 58.674,60.579 57.531,61.722 54.737,62.738 30.48,67.056 33.528,67.056 39.624,67.056 19.812,70.104 25.908,70.104 28.956,70.104 18.288,73.152 21.336,73.152 27.432,73.152 30.48,73.152
IN1: C8_1.2 MCU1.11 R7_1.2 R8_1.2 Z1_1.K | length 39.2
  Top Layer w0.381: v1(53.594,34.671) 54.375,34.671 56.22,36.516 MCU1.11 MCU1.11@56.246,37.08
  Top Layer w0.635: C8_1.2 R8_1.2@31.623,28.27 ; Z1_1.K@34.523,28.302 34.491,28.27 R8_1.2@31.623,28.27 ; R7_1.2 32.928,25.492 v1(31.877,26.543) 31.877,26.715 31.655,26.937 31.655,28.238 R8_1.2@31.623,28.27
  Bottom Layer w0.508: v1(31.877,26.543) 33.02,26.543 36.703,30.226 49.149,30.226 v1(53.594,34.671)
IN2: C8_2.2 MCU1.12 R7_2.2 R8_2.2 Z1_2.K | length 34
  Top Layer w0.381: R7_2.2 40.132,28.016 40.386,28.27 ; MCU1.12 57.774,37.73 58.039,37.465 58.039,35.306 57.193,34.46 56.431,34.46 v1(56.261,34.29)
  Top Layer w0.635: R8_2.2@39.041,28.27 39.041,28.068 39.264,27.846 R8_2.2@39.337,27.846 ; C8_2.2 39.041,30.423 39.194,30.27 39.234,30.27 39.751,29.753 39.751,29.003 39.379,28.631 39.264,28.631 39.081,28.448 R8_2.2 ; R8_2.2@39.113,28.27 40.386,28.27 41.949,28.27 41.98,28.302 41.98,26.6 v1(42.418,26.162)
  Bottom Layer w0.508: v1(42.418,26.162) 43.752,27.495 48.704,27.495 51.562,30.353 52.324,30.353 v1(56.261,34.29)
IN3: C8_3.2 MCU1.13 R7_3.2 R8_3.2 Z1_3.K | length 30.5
  Top Layer w0.381: R7_3.2 47.498,28.27 ; MCU1.13 58.521,38.38 59.535,37.366 59.535,36.477 v1(59.563,36.449)
  Top Layer w0.635: C8_3.2 46.915,28.27 47.498,28.27 49.406,28.27 49.438,28.302 49.438,25.918 49.784,25.572 v1(49.784,25.4)
  Bottom Layer w0.635: v1(49.784,25.4) 56.769,32.385 58.42,32.385 59.563,33.528 v1(59.563,36.449)
IN4: C8_4.2 MCU1.14 R7_4.2 R8_4.2 Z1_4.K | length 30.9
  Top Layer w0.381: MCU1.14 59.903,39.03 v1(60.579,38.354) ; Z1_4.K@56.864,28.27 56.896,28.27 56.985,28.27 57.277,27.978 R7_4.2 R7_4.2@57.15,25.527
  Top Layer w0.635: R8_4.2 54.466,28.27 R8_4.2@54.483,28.27 ; C8_4.2 R8_4.2@54.483,28.27 ; v1(55.372,25.908) 56.896,27.432 Z1_4.K@56.896,28.27 ; Z1_4.K@56.864,28.27 R8_4.2@54.483,28.27
  Bottom Layer w0.635: v1(55.372,25.908) 61.468,32.004 61.468,37.293 60.579,38.182 v1(60.579,38.354)
IN5: C8_5.2 MCU1.15 R7_5.2 R8_5.2 Z1_5.K | length 22.6
  Top Layer w0.381: MCU1.15 64.079,39.68 64.441,39.318 C8_5.2 64.441,28.5 63.373,27.432 R7_5.2
IN24_1: IN.1 R7_1.1 R10_1.2 | length 11.7
  Top Layer w0.635: R10_1.2 34.299,21.752 34.671,22.124 ; R7_1.1 34.671,22.124 ; IN.1@37.752,16.486 36.454,17.784 35.429,17.784 34.671,18.542 34.671,22.124
IN24_2: IN.2 R7_2.1 R10_2.2 | length 10.1
  Top Layer w0.635: R7_2.1 41.621,24.673 42.129,24.165 R10_2.2 42.312,22.423 42.312,16.927 IN.2@42.752,16.486
IN24_3: IN.3 R7_3.1 R10_3.2 | length 8.9
  Top Layer w0.508: R7_3.1 47.744,24.138 48.216,24.138 48.514,23.84 R10_3.2 48.268,21.979 48.268,17.002 IN.3@47.752,16.486
IN24_4: IN.4 R7_4.1 R10_4.2 | length 10.5
  Top Layer w0.508: IN.4@52.752,16.486 52.752,20.24 53.594,21.082 R10_4.2@55.035,21.082 ; R10_4.2 56.437,21.131 57.277,21.971 R7_4.1
IN24_5: IN.5 R7_5.1 R10_5.2 | length 11.8
  Top Layer w0.508: IN.5@57.752,16.486 57.752,17.929 59.182,19.359 59.182,23.359 59.48,23.657 R7_5.1
LED_MCU: MCU1.2 R6.2 | length 8.6
  Top Layer w0.381: MCU1.2 52.567,42.28 53.086,42.799 53.086,44.069 52.578,44.577 51.181,44.577 50.617,45.141 R6.2
MP3_PWR: MCU1.7 R21.2 | length 8.3
  Top Layer w0.381: R21.2 42.56,39.03 MCU1.7 ; R21.2@42.347,39.37 R21.2@42.418,39.37
Net24V_1: 24V.1 D6.A | length 11
  Top Layer w0.762: 24V.1 37.639,69.977 40.386,69.977 41.91,68.453 D6.A
NetBR1_+: BR1.+ UR_DC.2 | length 14.8
  Bottom Layer w1.524: UR_DC.2 90.703,35.661 92.193,37.15 92.193,37.366 94.281,39.454 BR1.+
NetBR1_-: BR1.- UR_DC.1 | length 27.2
  Bottom Layer w1.524: BR1.- 79.281,45.56 80.645,44.196 84.07,44.196 84.963,43.303 84.963,32.004 86.306,30.661 UR_DC.1
NetBR1_F: BR1.F URIN.1 | length 11.7
  Bottom Layer w1.524: BR1.F 89.281,58.498 90.527,59.744 URIN.1
NetBR1_N: BR1.N RELAY2.4 | length 16.7
  Bottom Layer w1.524: RELAY2.4@75.153,57.436 75.318,57.271 75.318,55.63 76.21,54.737 83.388,54.737 84.281,53.844 BR1.N
NetC1_2: C1.2 IC3.5 R4.2 R31.2 | length 7.4
  Top Layer w0.381: R31.2 50.179,62.668 50.179,60.44 50.293,60.325 IC3.5
  Top Layer w0.508: C1.2 47.879,63.321 47.967,63.233 48.781,63.233 49.199,62.815 50.032,62.815 R31.2
NetC12_1: C12.1 U1.2 U1.3 | length 4.1
  Top Layer w0.508: C12.1 18.562,25.908 18.689,26.035 U1.2 U1.3
NetC16_1: C16.1 R18.2 | length 5.5
  Top Layer w0.635: C16.1 12.463,23.605 13.081,22.987 R18.2
NetC23_1: C23.1 J1.4 R23.1 | length 9.3
  Top Layer w0.381: v1(24.384,37.719) 24.447,37.655 25.59,37.655 26.416,36.83 R23.1
  Bottom Layer w0.381: J1.4 22.526,37.671 24.336,37.671 v1(24.384,37.719)
NetC25_1: C25.1 IC2.8 | length 2.6
  Top Layer w0.635: C25.1 33.151,63.985 33.528,63.608 IC2.8
NetC25_2: C25.2 D9.K IC2.1 L1.1 | length 17.4
  Top Layer w0.635: L1.1@18.289,64.008 18.289,64.795 18.772,65.278 D9.K 27.051,65.278 28.318,64.011 28.318,63.497 ; IC2.1 28.318,63.497 ; C25.2 28.846,64.025 28.318,63.497
NetC29_2: C29.2 IC2.4 R25.1 R27.2 | length 11.4
  Top Layer w0.381: R25.1 C29.2 24.161,53.03 24.384,53.253 24.384,54.356 24.638,54.61 R27.2 25.781,57.023 26.543,57.785 IC2.4
NetC30_1: C30.1 R28.1 | length 2.1
  Top Layer w0.381: R28.1 C30.1
NetC30_2: C30.2 C31.2 IC2.3 | length 6.4
  Top Layer w0.381: C30.2 C31.2@24.257,59.523 ; C31.2 C31.2@24.257,59.523 ; IC2.3 24.725,59.055 C31.2@24.257,59.523
NetD1_A: D1.A R38.2 RELAY1.3 T2.2 | length 44.3
  Top Layer w0.635: D1.A 72.241,45.526 71.053,45.526 70.358,44.831 T2.2 68.072,40.69 68.835,39.927 68.835,36.194 70.104,34.925 83.947,34.925 84.709,34.163 84.709,25.908 87.32,23.297 R38.2
NetD2_A: D2.A@72.484,48.817 R39.2 RELAY2.3 T3.2 | length 30.5
  Top Layer w0.635: D2.A@72.484,48.817 73.016,49.349 73.016,50.156 73.406,50.546 74.168,50.546 74.549,50.927 T3.2 74.93,52.832 76.073,53.975 80.899,53.975 81.407,54.483 81.407,59.682 RELAY2.3 ; v1(85.598,60.071) 85.598,64.262 85.852,64.516 R39.2
  Bottom Layer w0.635: RELAY2.3 81.03,60.067 85.594,60.067 v1(85.598,60.071)
NetD2_K: D2.K@87.249,72.009 R39.1 | length 4.3
  Top Layer w0.635: R39.1 86.868,68.834 87.249,69.215 D2.K@87.249,72.009
NetDOOR2_1: DOOR2.1 RELAY1.1 | length 13.9
  Bottom Layer w1.524: RELAY1.1 69.28,21.59 73.563,17.307 73.563,16.804 74.375,15.993 DOOR2.1
NetDOOR2_2: DOOR2.2 RELAY1.4 | length 26
  Bottom Layer w1.524: RELAY1.4 75.184,40.647 75.184,24.257 78.997,20.444 78.997,16.864 DOOR2.2@79.375,16.486
NetDOOR2_3: DOOR2.3 RELAY1.2 | length 11.2
  Bottom Layer w1.524: RELAY1.2 81.28,26.162 84.375,23.067 DOOR2.3@84.375,16.63
NetF1_1: F1.1 R2.2 | length 3.5
  Top Layer w0.508: F1.1 55.88,65.024 55.88,64.135 56.134,63.881 R2.2
NetIC2_2: IC2.2 R24.2 | length 4.9
  Top Layer w0.381: R24.2 25.654,61.595 25.908,61.341 25.908,60.833 26.416,60.325 IC2.2
NetIC2_6: IC2.6 R26.1 | length 4
  Top Layer w0.635: IC2.6 35.95,59.055 35.95,57.933 36.133,57.75 R26.1
NetIC3_1: IC3.1 R3.2 R33.1 | length 6
  Top Layer w0.381: IC3.1 58.182,56.515 58.483,56.816 58.547,56.753 59.42,55.88 R33.1 ; R3.2 R3.2@58.46,56.84
NetIC3_2: IC3.2 R30.2 R32.2 | length 11.6
  Top Layer w0.381: IC3.2 55.978,57.756 54.581,57.756 54.229,57.404 54.229,55.499 54.737,54.991 57.15,54.991 57.404,54.737 R30.2 57.439,53.813 60.614,53.813 R32.2 R32.2@60.65,53.888
NetIC3_3: IC3.3 R3.1 R9.2 R37.2 | length 12.4
  Top Layer w0.381: R9.2 R37.2 53.089,53.901 53.089,55.248 53.467,55.626 53.467,58.039 54.483,59.055 IC3.3 58.07,59.055 58.293,58.832 58.293,58.674 R3.1@58.547,58.42
NetIC3_6: IC3.6 R35.2 R36.2 | length 4.7
  Top Layer w0.508: R36.2 46.256,59.281 48.069,59.281 48.26,59.09 50.761,59.09 IC3.6
NetIC3_7: IC3.7 R31.1 R34.1 | length 11
  Top Layer w0.381: IC3.7 52.355,57.785 52.578,58.008 52.578,58.547 52.705,58.674 52.705,62.515 52.482,62.738 R31.1@51.999,62.738
  Top Layer w0.508: R34.1 47.76,56.769 48.006,57.015 48.006,57.531 48.26,57.785 IC3.7
NetJ1_1: J1.1
NetJ1_2: J1.2
NetJ1_8: J1.8
NetJ1_9: J1.9
NetLED1_A: LED1.A R6.1 | length 2.8
  Top Layer w0.381: R6.1 52.215,46.754 52.215,49.511 LED1.A
NetLED2_A: LED2.A R17.1 | length 2.2
  Top Layer w0.381: R17.1 39.688,36.259 41.683,36.259 LED2.A
NetLED3_A: LED3.A R1.1 | length 2.7
  Top Layer w0.635: R1.1 45.72,49.236 45.873,49.083 46.294,49.083 46.863,48.514 LED3.A
NetLED4_1_A: LED4_1.A R10_1.1 | length 2.5
  Top Layer w0.635: LED4_1.A 29.845,23.495 32.004,23.495 R10_1.1
NetLED4_2_A: LED4_2.A R10_2.1 | length 3.4
  Top Layer w0.635: LED4_2.A 37.315,23.495 38.204,22.606 R10_2.1
NetLED4_3_A: LED4_3.A R10_3.1 | length 2.6
  Top Layer w0.508: LED4_3.A 44.893,23.368 45.283,22.977 45.283,22.408 45.466,22.225 R10_3.1
NetLED4_4_A: LED4_4.A R10_4.1 | length 2.9
  Top Layer w0.508: LED4_4.A 54.368,23.458 54.825,23.001 R10_4.1
NetLED4_5_A: LED4_5.A R10_5.1 | length 2.6
  Top Layer w0.381: R10_5.1 60.96,25.654 LED4_5.A
NetMCU1_3: MCU1.3
NetMCU1_6: MCU1.6 R5.2 | length 5.6
  Top Layer w0.381: R5.2 45.72,40.584 45.72,40.005 46.045,39.68 MCU1.6
NetQ3_1: Q3.1 Q5.1 R33.2 | length 16.1
  Top Layer w0.508: R33.2@63.048,55.92 R33.2 64.025,55.88 64.406,56.261 64.406,61.46 ; Q3.1 63.73,61.764 63.772,61.722 64.144,61.722 64.406,61.46 ; Q5.1 64.144,69.088 64.436,68.796 64.436,61.49 64.406,61.46
NetQ3_3: Q3.3 Q5.3 R2.1 | length 10.2
  Top Layer w0.508: R2.1 58.412,65.997 59.511,65.997 ; Q3.3 60.73,62.315 60.688,62.357 60.071,62.357 59.944,62.484 59.944,64.77 59.511,65.203 59.511,65.997 ; Q5.3 60.73,68.876 60.688,68.834 59.944,68.834 59.563,68.453 59.563,66.049 59.511,65.997
NetQ4_G: Q4.G R11.1 R20.2 | length 4.1
  Top Layer w0.381: Q4.G@35.814,43.561 35.687,43.688 R20.2 R11.1
NetR11_2: R11.2 T1.2 | length 2.3
  Top Layer w0.381: T1.2 38.674,43.903 38.864,44.094 38.881,44.094 39.299,44.511 R11.2
NetR12_2: R12.2 R13.2 T2.1 | length 5.8
  Top Layer w0.508: R12.2 67.747,51.905 67.963,51.689 68.465,51.689 68.763,51.391 68.763,50.038
  Top Layer w0.635: 68.763,50.038 R13.2 68.763,48.982 69.022,48.723 T2.1
NetR14_2: R14.2 R29.2 T3.1 | length 4.7
  Top Layer w0.635: R14.2 67.78,53.815 72.396,53.815 T3.1
NetR18_1: R18.1 R19.2 U1.4 | length 6.6
  Top Layer w0.508: R18.1 16.312,23.025 16.528,23.241 17.145,23.241 17.399,23.495 U1.4 19.239,22.036 19.939,21.336 R19.2
NetR21_1: R21.1 T1.1 | length 4.9
  Top Layer w0.381: T1.1 37.724,39.746 38.227,39.243 R21.1
NetR38_1: R38.1 URA.K | length 3.3
  Top Layer w0.635: R38.1 91.706,21.436 92.038,21.104 URA.K
NetRELAY2_1: RELAY2.1 URIN.2 | length 14.3
  Bottom Layer w1.524: RELAY2.1@81.153,71.636 81.153,68.427 84.836,64.744 URIN.2
NetRELAY2_2: RELAY2.2
NetU2_10: U2.10
NetU2_11: U2.11
NetU2_13: U2.13
RELAY1: MCU1.16 R12.1 | length 19.6
  Top Layer w0.381: MCU1.16 62.555,40.33 65.532,43.307 65.532,43.942
  Top Layer w0.508: 65.532,43.942 65.532,51.516 65.703,51.687 65.951,51.687 66.167,51.903 R12.1
RELAY2: MCU1.17 R14.1 | length 20.7
  Top Layer w0.381: MCU1.17 61.046,40.98 62.738,42.672 63.246,42.672 64.008,43.434 64.008,52.705 65.151,53.848 R14.1
RX1: MCU1.1 R34.2 Z4.K | length 16.8
  Top Layer w0.381: 47.752,52.705 47.752,48.26 48.514,47.498 48.514,44.073 49.657,42.93 MCU1.1
  Top Layer w0.508: Z4.K 47.352,52.305 47.752,52.705 R34.2
RX2: MCU1.10
RX_MP3: MCU1.9 U2.12 | length 54.1
  Top Layer w0.381: 43.942,34.417 47.371,34.417 48.525,35.571 48.525,37.211 49.044,37.73 MCU1.9
  Top Layer w0.508: v1(13.716,40.767) 13.716,40.513 13.97,40.259 U2.12 ; v1(26.67,32.004) 29.083,34.417 43.942,34.417
  Bottom Layer w0.508: v1(13.716,40.767) 17.526,36.957 17.526,29.337 18.288,28.575 22.733,28.575 26.162,32.004 v1(26.67,32.004)
SD_CLK: J1.5 U2.6 | length 11.6
  Top Layer w0.381: U2.6 23.876,41.529 24.765,40.64 v1(24.892,40.64)
  Bottom Layer w0.381: J1.5 23.98,36.523 24.181,36.322 25.146,36.322 25.908,37.084 25.908,38.862 24.983,39.787 24.983,40.549 v1(24.892,40.64)
SD_CMD: J1.3 U2.7 | length 14.2
  Top Layer w0.381: U2.7 v1(25.019,42.799)
  Bottom Layer w0.381: J1.3 22.466,38.735 20.574,38.735 20.193,39.116 20.193,42.164 20.828,42.799 v1(25.019,42.799)
SD_DAT: J1.7 U2.8 | length 21.2
  Top Layer w0.381: U2.8 23.693,44.069 24.455,44.831 v1(24.638,44.831)
  Bottom Layer w0.381: J1.7 21.106,34.323 21.104,34.321 20.416,34.321 20.193,34.544 20.193,37.084 19.177,38.1 19.177,43.307 19.812,43.942 23.749,43.942 v1(24.638,44.831)
SER_A: CA.2 R4.1 | length 5.6
  Top Layer w0.508: R4.1 47.879,67.439 48.921,68.481 CA.2@48.921,70.041
SER_B: CA.1 F1.2 | length 6.9
  Top Layer w0.635: F1.2 50.938,65.336 50.938,66.051 53.173,68.286 53.173,70.318 CA.1
SPKA: SP1.1 U1.8 | length 19.4
  Top Layer w0.635: SP1.1 22.178,18.495 v1(23.368,19.685) ; U1.8 26.498,27.305 26.879,27.686 v1(27.051,27.686)
  Bottom Layer w0.635: v1(23.368,19.685) 23.368,26.416 24.638,27.686 v1(27.051,27.686)
SPKB: R19.1 SP1.2 U1.5 | length 12.5
  Top Layer w0.635: R19.1 23.241,21.336 23.876,21.336 24.449,21.909 ; U1.5 24.449,21.909 ; SP1.2 26.63,15.026 26.63,19.728 24.449,21.909 ; SP1.2@27.94,14.351 SP1.2@27.94,14.478
SWCLK: MCU1.19 PROG.2 | length 9.4
  Top Layer w0.381: MCU1.19 57.901,42.28 58.166,42.545 58.166,46.609 58.674,47.117 PROG.2
SWDIO: MCU1.18 PROG.3 | length 7.3
  Top Layer w0.381: MCU1.18 60.045,41.63 61.214,42.799 PROG.3
TX1: MCU1.20 R9.1 | length 10.1
  Top Layer w0.381: R9.1 55.245,50.419 54.61,49.784 54.61,45.72 56.22,44.11 MCU1.20
VCOM: C20.2 U2.9 | length 3
  Top Layer w0.381: C20.2 15.171,44.704 15.805,44.069 U2.9
VPN: C17.2 U2.15 | length 3.2
  Top Layer w0.508: C17.2 U2.15
pads on no net: J1.

## Polygon pours and split planes (outlines as drawn)
GND on Top Layer "GND_L01_P000" (solid, remove dead copper, pour order 0): 64.986,75.944 10.122,75.944 10.122,10.231 63.716,10.231 64.732,11.247 64.732,75.763
GND on Bottom Layer "GND_L02_P001" (solid, remove dead copper, pour order 1): 64.897,76.019 10.033,76.019 10.033,10.327 10.054,10.306 63.627,10.306 64.897,11.576

## Keep-outs
Keep-Out Layer:
  the board outline again, w0.254

## Other copper
Top Layer:
  rectangle net +24: 58.166,70.739 59.944,72.39
  region net +24: 46.99,60.579 46.99,62.103 44.577,62.103 44.577,60.579
  rectangle net +24: 49.657,53.086 51.181,55.499
  rectangle net +24: 38.1,54.737 39.624,57.15
  rectangle net +24: 20.447,60.96 21.971,63.373
Bottom Layer:
  rectangle net +24: 58.166,70.612 59.944,72.39
  rectangle net +24: 20.447,60.833 21.971,63.373
  region net +24: 44.323,62.103 44.323,60.579 46.863,60.579 46.863,62.103
  region net +24: 51.181,55.753 49.657,55.753 49.657,53.213 51.181,53.213
  rectangle net +24: 38.1,54.737 39.624,57.277

## Silkscreen, mask and mechanical layers (free items; w line width, h text height)
Top Overlay:
  lines w0.254: 9.97,14.097 13.97,14.097 13.97,10.097 ; 10.097,72.009 14.097,72.009 14.097,76.009 ; 92.583,76.009 92.583,72.009 96.583,72.009 ; 92.71,10.097 92.71,14.097 96.71,14.097
  text "CB" at 58.928,73.533 h1.52
  text "GND" at 23.495,71.374 h1.52
  text "+" at 41.91,67.437 h1.52
  text "L5D" at 86.614,61.976 h1.52 r90
  text "MP" at 86.487,56.388 h1.52 r90
  text "UR+" at 86.106,35.179 h1.52 r90
  text "UR-" at 85.979,28.956 h1.52 r90
  text "CM" at 77.343,18.923 h1.52
  text "C" at 73.787,18.796 h1.52
  text "O" at 82.804,18.796 h1.52
  text "REV" at 35.306,18.415 h1.52
  text "GU1" at 40.894,18.415 h1.52
  text "GU2" at 46.101,18.415 h1.52
  text "STP" at 51.816,18.415 h1.52
  text "DO" at 57.277,18.415 h1.52
  text "SP2" at 25.908,18.161 h1.52